# Altium PCB bms_afe_tester-1_1.PcbDoc (part 3 of 6)
Units mm, origin at the board's own origin, x right, y up, seen from the top; angles counter-clockwise.
Board outline 410 x 67 mm, 4 copper layers (L1, L2, L3, L4), stack 1.586 mm thick; 598 components, 356 nets, 1901 pads, 1542 vias.
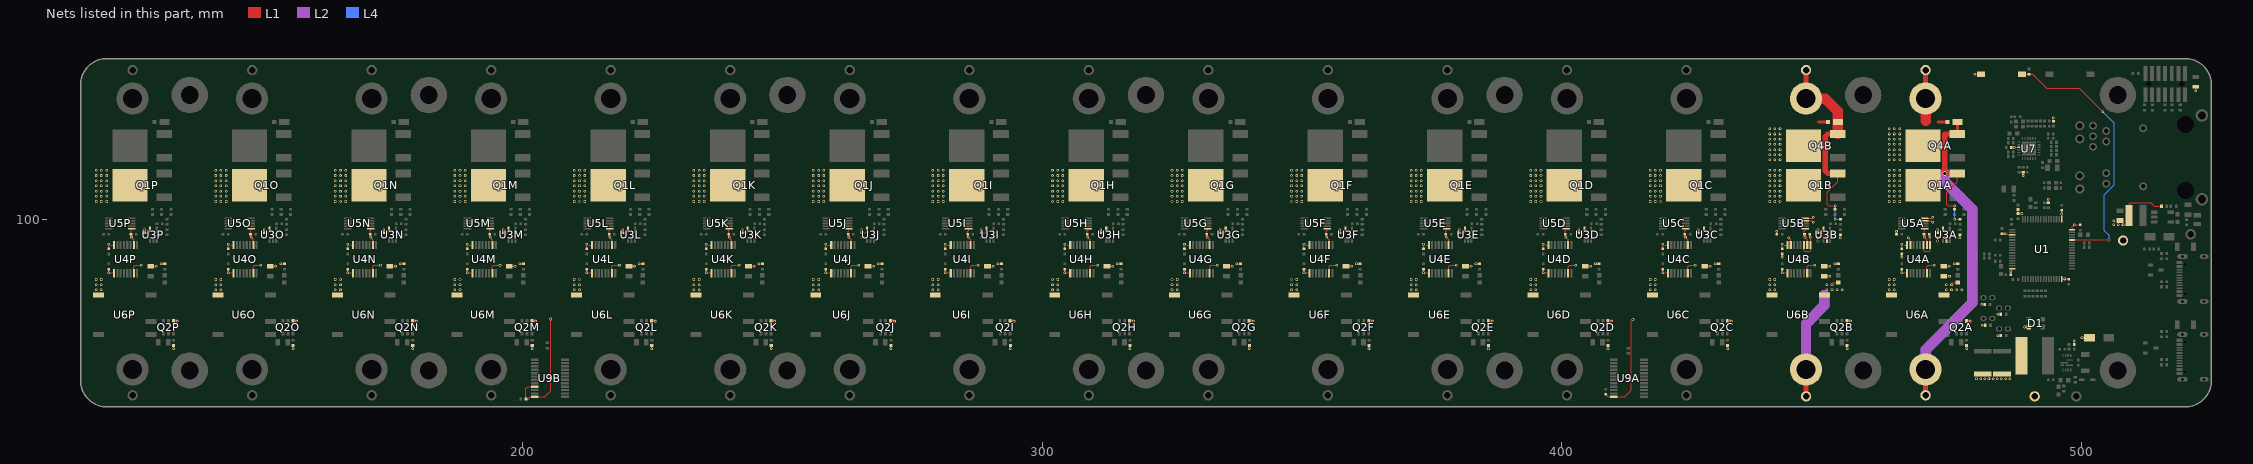
[diagram p4: the nets of this part, all layers, seen from the top]

## Via types
v1: diameter 0.5, hole 0.3, L1 to L4, 1524 vias
v2: diameter 0.65, hole 0.3, L1 to L4, 10 vias
v3: diameter 0.9, hole 0.6, L1 to L4, 8 vias

## Nets (pads, with @x,y where several pads share a name; then routed paths per layer and width w, separated by ;. In a path a pad name is that pad's centre, name@x,y a point inside that pad or via, vN(x,y) a via of type N, cw(c..) or ccw(c..) an arc to the next point about the centre after c; other vN are vias at no path point) (continued)
BIASK: (continued)
  L1 w0.2: C26K.1@235.4,94.4 v1@235.4,95.227 ; 235.8,95.1 U4K.16@236.43,95.1 ; U5K.1@239.847,98.275 239.847,97.948 239.7,97.8 C24K.1@239.7,97.2 239.8,97.1 v1(239.8,96.6) 240.24,96.16 U4K.10@240.24,95.1 ; v1(242.3,98.1) C20K.1@242.3,97.5 243.2,97.5 243.35,97.65 U3K.5@243.35,98.2 ; C23K.1@243.5,91.05 243.523,91.073 v1(244.585,91.073) v1@244.563,91.05 ; v1(245.5,91.5) R44K.2@246.2,91.5
  other v1: 233,86.5 234,86.5 233,87.5 234,87.5 233,88.5 234,88.5 235.4,95.3 233,103.5 234,103.5 235,103.5 233,104.5 234,104.5 235,104.5 233,105.5 234,105.5 235,105.5 233,106.5 234,106.5 235,106.5 233,107.5 234,107.5 235,107.5 233,108.5 234,108.5 235,108.5 233,109.5 234,109.5 235,109.5
BIASL: C20L.1 C23L.1 C24L.1 C26L.1 Q1L.4 R44L.2 U3L.5 U4L.10 U4L.16 U5L.1 U6L.5 | length 9
  L1 w0.2: C26L.1@212.4,94.4 v1@212.4,95.227 ; 212.8,95.1 U4L.16@213.43,95.1 ; U5L.1@216.847,98.275 216.847,97.948 216.7,97.8 C24L.1@216.7,97.2 216.8,97.1 v1(216.8,96.6) 217.24,96.16 U4L.10@217.24,95.1 ; v1(219.3,98.1) C20L.1@219.3,97.5 220.2,97.5 220.35,97.65 U3L.5@220.35,98.2 ; C23L.1@220.5,91.05 220.523,91.073 v1(221.585,91.073) v1@221.563,91.05 ; v1(222.5,91.5) R44L.2@223.2,91.5
  other v1: 210,86.5 211,86.5 210,87.5 211,87.5 210,88.5 211,88.5 212.4,95.3 210,103.5 211,103.5 212,103.5 210,104.5 211,104.5 212,104.5 210,105.5 211,105.5 212,105.5 210,106.5 211,106.5 212,106.5 210,107.5 211,107.5 212,107.5 210,108.5 211,108.5 212,108.5 210,109.5 211,109.5 212,109.5
BIASM: C20M.1 C23M.1 C24M.1 C26M.1 Q1M.4 R44M.2 U3M.5 U4M.10 U4M.16 U5M.1 U6M.5 | length 9
  L1 w0.2: C26M.1@189.4,94.4 v1@189.4,95.227 ; 189.8,95.1 U4M.16@190.43,95.1 ; U5M.1@193.847,98.275 193.847,97.948 193.7,97.8 C24M.1@193.7,97.2 193.8,97.1 v1(193.8,96.6) 194.24,96.16 U4M.10@194.24,95.1 ; v1(196.3,98.1) C20M.1@196.3,97.5 197.2,97.5 197.35,97.65 U3M.5@197.35,98.2 ; C23M.1@197.5,91.05 197.523,91.073 v1(198.585,91.073) v1@198.563,91.05 ; v1(199.5,91.5) R44M.2@200.2,91.5
  other v1: 187,86.5 188,86.5 187,87.5 188,87.5 187,88.5 188,88.5 189.4,95.3 187,103.5 188,103.5 189,103.5 187,104.5 188,104.5 189,104.5 187,105.5 188,105.5 189,105.5 187,106.5 188,106.5 189,106.5 187,107.5 188,107.5 189,107.5 187,108.5 188,108.5 189,108.5 187,109.5 188,109.5 189,109.5
BIASN: C20N.1 C23N.1 C24N.1 C26N.1 Q1N.4 R44N.2 U3N.5 U4N.10 U4N.16 U5N.1 U6N.5 | length 9
  L1 w0.2: C26N.1@166.4,94.4 v1@166.4,95.227 ; 166.8,95.1 U4N.16@167.43,95.1 ; U5N.1@170.847,98.275 170.847,97.948 170.7,97.8 C24N.1@170.7,97.2 170.8,97.1 v1(170.8,96.6) 171.24,96.16 U4N.10@171.24,95.1 ; v1(173.3,98.1) C20N.1@173.3,97.5 174.2,97.5 174.35,97.65 U3N.5@174.35,98.2 ; C23N.1@174.5,91.05 174.523,91.073 v1(175.585,91.073) v1@175.563,91.05 ; v1(176.5,91.5) R44N.2@177.2,91.5
  other v1: 164,86.5 165,86.5 164,87.5 165,87.5 164,88.5 165,88.5 166.4,95.3 164,103.5 165,103.5 166,103.5 164,104.5 165,104.5 166,104.5 164,105.5 165,105.5 166,105.5 164,106.5 165,106.5 166,106.5 164,107.5 165,107.5 166,107.5 164,108.5 165,108.5 166,108.5 164,109.5 165,109.5 166,109.5
BIASO: C20O.1 C23O.1 C24O.1 C26O.1 Q1O.4 R44O.2 U3O.5 U4O.10 U4O.16 U5O.1 U6O.5 | length 9
  L1 w0.2: C26O.1@143.4,94.4 v1@143.4,95.227 ; 143.8,95.1 U4O.16@144.43,95.1 ; U5O.1@147.847,98.275 147.847,97.948 147.7,97.8 C24O.1@147.7,97.2 147.8,97.1 v1(147.8,96.6) 148.24,96.16 U4O.10@148.24,95.1 ; v1(150.3,98.1) C20O.1@150.3,97.5 151.2,97.5 151.35,97.65 U3O.5@151.35,98.2 ; C23O.1@151.5,91.05 151.523,91.073 v1(152.585,91.073) v1@152.563,91.05 ; v1(153.5,91.5) R44O.2@154.2,91.5
  other v1: 141,86.5 142,86.5 141,87.5 142,87.5 141,88.5 142,88.5 143.4,95.3 141,103.5 142,103.5 143,103.5 141,104.5 142,104.5 143,104.5 141,105.5 142,105.5 143,105.5 141,106.5 142,106.5 143,106.5 141,107.5 142,107.5 143,107.5 141,108.5 142,108.5 143,108.5 141,109.5 142,109.5 143,109.5
BIASP: C20P.1 C23P.1 C24P.1 C26P.1 Q1P.4 R44P.2 U3P.5 U4P.10 U4P.16 U5P.1 U6P.5 | length 9
  L1 w0.2: C26P.1@120.4,94.4 v1@120.4,95.227 ; 120.8,95.1 U4P.16@121.43,95.1 ; U5P.1@124.847,98.275 124.847,97.948 124.7,97.8 C24P.1@124.7,97.2 124.8,97.1 v1(124.8,96.6) 125.24,96.16 U4P.10@125.24,95.1 ; v1(127.3,98.1) C20P.1@127.3,97.5 128.2,97.5 128.35,97.65 U3P.5@128.35,98.2 ; C23P.1@128.5,91.05 128.523,91.073 v1(129.585,91.073) v1@129.563,91.05 ; v1(130.5,91.5) R44P.2@131.2,91.5
  other v1: 118,86.5 119,86.5 118,87.5 119,87.5 118,88.5 119,88.5 120.4,95.3 118,103.5 119,103.5 120,103.5 118,104.5 119,104.5 120,104.5 118,105.5 119,105.5 120,105.5 118,106.5 119,106.5 120,106.5 118,107.5 119,107.5 120,107.5 118,108.5 119,108.5 120,108.5 118,109.5 119,109.5 120,109.5
BOOT0_2: R39.1 S3.1 U1.60 | length 52.4
  L1 w0.203: S3.1@488.55,128 R39.1@489.9,128 490.6,128 493.3,125.3 499.6,125.3 v1(504.1,120.8) ; U1.60@498.2,96.1 v1(505.3,96.1)
  L4 w0.203: v1(504.1,120.8) 506.3,118.6 506.3,106.7 504.4,104.8 504.4,97.9 505.3,97 v1(505.3,96.1)
C0_1_N: C20A.2 C23A.2 C24A.2 C26A.2 C27A.2 D4A.2 D8A.1 H1.1 Q4A.4 R19A.1 TP5.1 U3A.2 U4A.9 U4A.11 U4A.15 U5A.4 U5A.5 U6A.4 | length 29.8
  L1 w0.2: C27A.2@464.4,97.2 v1(464.4,97.8) ; v1(465.4,92.8) C26A.2@465.4,93.4 ; v1(466.7,96.5) 467.065,96.135 U4A.15@467.065,95.1 ; U4A.11@469.605,95.1 469.605,94.095 469.8,93.9 470.7,93.9 470.875,94.075 U4A.9@470.875,95.1 470.875,96.525 v1(470.8,96.6) 470.8,97.1 C24A.2@470.7,97.2 ; U5A.4@469.847,99.775 471.125,99.775 v1(471.4,99.5) ; U5A.5@469.847,100.275 471.175,100.275 v1(471.4,100.5) ; v1(472.3,95.9) C20A.2@472.3,96.5 472.6,96.8 473.8,96.8 474,96.6 U3A.2@474,96 ; C23A.2@473.5,89.15 473.55,89.1 v1(474.6,89.1) v1@474.55,89.15 ; v1(475,87.5) 475,87.781 475.119,87.9 D4A.2@476.2,87.9 ; v1(476.6,96.5) R19A.1@476.6,97.1
  L1 w0.5: 472.4,118.8 D8A.1@474.25,118.8
  L1 w1: H1.1@470,123.3 TP5.1@470,128.8
  L1 w2: 470,119 H1.1@470,123.3
  other v1: 474,86.5 475,86.5 476,86.5 477,86.5 474,87.5 463,111.5 464,111.5 465,111.5 463,112.5 464,112.5 465,112.5 463,113.5 464,113.5 465,113.5 463,114.5 464,114.5 465,114.5 463,115.5 464,115.5 465,115.5 463,116.5 464,116.5 465,116.5 463,117.5 464,117.5 465,117.5
C0_1_P: D8A.2 H2.1 Q1A.3 Q4A.3 R17A.1 R53A.1 TP4.1 | length 119.6
  L1 w0.2: v1(475.6,100.1) R17A.1@476.6,100.1 ; R53A.1@475.6,102 v1(475.6,102.7) 474.4,102.7 474.1,103 474.1,105.3 476.1,107.3 Q1A.3@476.1,108.886
  L1 w0.5: Q4A.3@476.1,116.486 476.15,116.536 D8A.2@476.15,118.8
  L1 w1: TP4.1@470,66.2 H2.1@470,71.2 ; Q1A.3@476.1,108.886 473.714,108.886 v3(473.7,108.9) 473.7,116.486 Q4A.3@476.1,116.486
  L2 w2: H2.1@470,71.2 470,75 479,84 479,102 473.7,107.3 v3(473.7,108.9)
  L4 w0.2: v1(475.6,100.1) v1(475.6,102.7)
  L4 w2: H2.1@470,71.2 470,75 479,84 479,102 473.7,107.3 v3(473.7,108.9)
C1_1_N: C20B.2 C23B.2 C24B.2 C26B.2 C27B.2 D4B.2 D8B.1 H3.1 Q4B.4 R19B.1 TP7.1 U3B.2 U4B.9 U4B.11 U4B.15 U5B.4 U5B.5 U6B.4 | length 56.7
  L1 w0.2: C27B.2@441.4,97.2 v1(441.4,97.8) ; v1(442.4,92.8) C26B.2@442.4,93.4 ; v1(443.7,96.5) 444.065,96.135 U4B.15@444.065,95.1 ; U4B.11@446.605,95.1 446.605,94.095 446.8,93.9 447.7,93.9 447.875,94.075 U4B.9@447.875,95.1 447.875,96.525 v1(447.8,96.6) 447.8,97.1 C24B.2@447.7,97.2 ; U5B.4@446.847,99.775 448.125,99.775 v1(448.4,99.5) ; U5B.5@446.847,100.275 448.175,100.275 v1(448.4,100.5) ; v1(449.3,95.9) C20B.2@449.3,96.5 449.6,96.8 450.8,96.8 451,96.6 U3B.2@451,96 ; C23B.2@450.5,89.15 450.55,89.1 v1(451.6,89.1) v1@451.55,89.15 ; v1(452,87.5) 452,87.781 452.119,87.9 D4B.2@453.2,87.9 ; v1(453.6,96.5) R19B.1@453.6,97.1
  L1 w0.5: 449.4,118.8 D8B.1@451.25,118.8
  L1 w1: TP7.1@447,66 H3.1@447,71.2
  L2 w2: H3.1@447,71.2 447,80 450.5,83.5 450.5,85.5
  L4 w2: H3.1@447,71.2 447,80 450.5,83.5 450.5,85.5
  other v1: 451,86.5 452,86.5 453,86.5 454,86.5 451,87.5 440,111.5 441,111.5 442,111.5 440,112.5 441,112.5 442,112.5 440,113.5 441,113.5 442,113.5 440,114.5 441,114.5 442,114.5 440,115.5 441,115.5 442,115.5 440,116.5 441,116.5 442,116.5 440,117.5 441,117.5 442,117.5
C1_1_P: D8B.2 H4.1 Q1B.3 Q4B.3 R17B.1 R53B.1 TP6.1 | length 41.5
  L1 w0.2: v1(452.6,100.1) R17B.1@453.6,100.1 ; R53B.1@452.6,102 v1(452.6,102.7) 451.4,102.7 451.1,103 451.1,105.3 453.1,107.3 Q1B.3@453.1,108.886
  L1 w0.5: Q4B.3@453.1,116.486 Q4B.3@453.15,116.536
  L1 w1: H4.1@447,123.3 TP6.1@447,128.8 ; Q1B.3@453.1,108.886 451.214,108.886 450.7,109.4 450.7,116 451.186,116.486 Q4B.3@453.1,116.486
  L1 w2: H4.1@447,123.3 450.7,123.3 453.1,120.9 Q4B.3@453.1,116.486
  L4 w0.2: v1(452.6,100.1) v1(452.6,102.7)